# Altium PCB smart-water-sensor.PcbDoc (part 3 of 5)
Units mm, origin at the board's own origin, x right, y up, seen from the top; angles counter-clockwise.
Board outline 124.33 x 108.9 mm, 4 copper layers (Top Layer, Layer 1, Layer 2, Bottom Layer), stack 0.603 mm thick; 150 components, 74 nets, 469 pads, 463 vias.
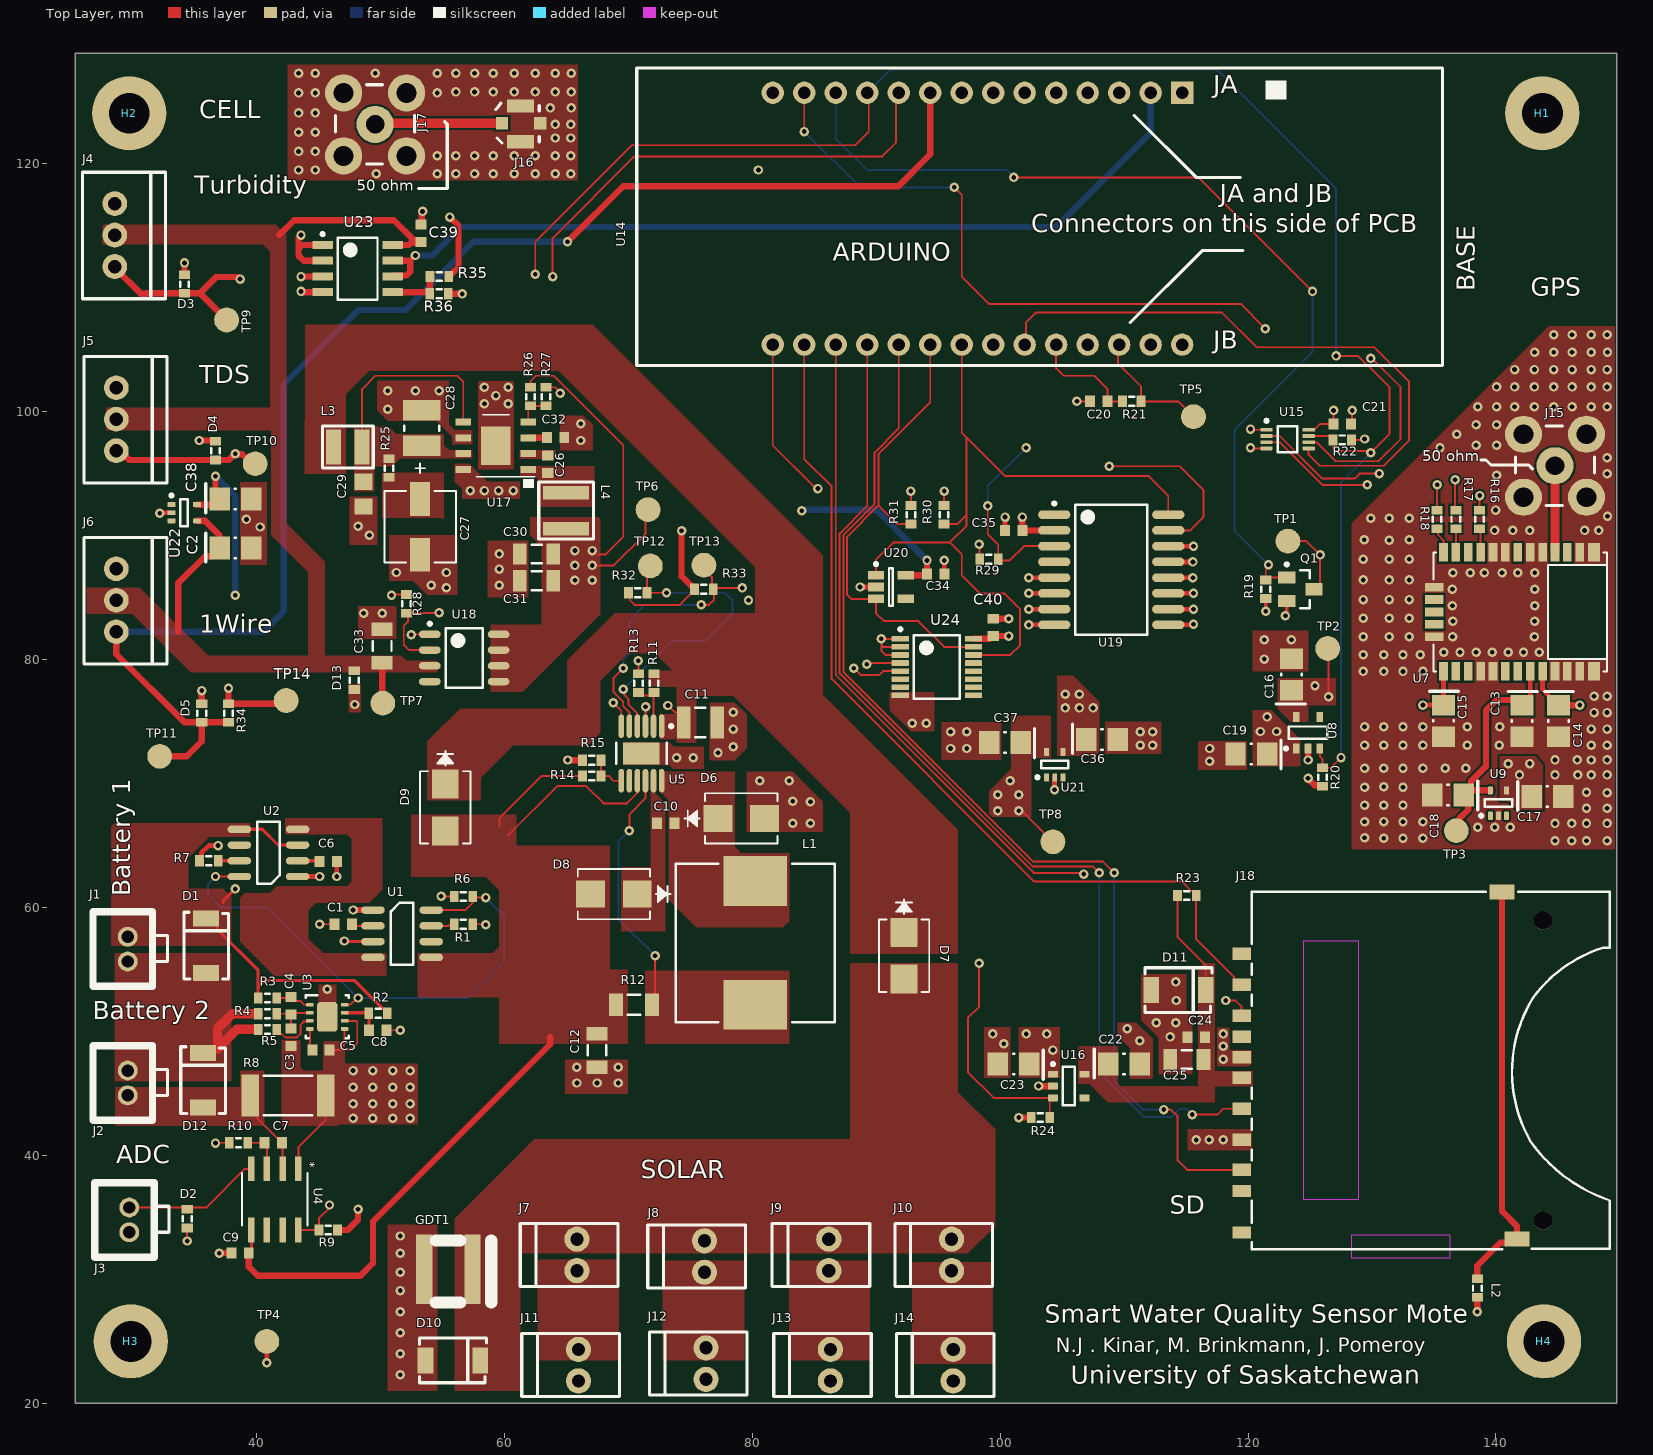
[diagram p0: Top Layer view]

## Part data (continued)
R4: "Resistor", Case/Package=0603, Case Code (Metric)=1608, Manufacturer=Panasonic, Manufacturer Part Number=ERJ3EKF2700V, Max Operating Temperature=155°C, Max Power Dissipation=100mW, Min Operating Temperature=-55°C, Package Quantity=1, Resistance=270R, Supplier Part Number 1=P270HCT-ND, Temperature Coefficient=100ppm/°C, Tolerance=1%, Voltage Rating=75V, Case Code (Imperial)=0603, ComponentLink1Description=https://datasheet.ciiva.com/5860/aoa0000ce2-5860661.pdf?src-supplier=Farnell, ComponentLink1URL=https://datasheet.ciiva.com/5860/aoa0000ce2-5860661.pdf?src-supplier=Farnell, ComponentLink2Description=https://datasheet.ciiva.com/9183/aoa0000ce2-9183606.pdf?src-supplier=Avnet, ComponentLink2URL=https://datasheet.ciiva.com/9183/aoa0000ce2-9183606.pdf?src-supplier=Avnet, ComponentLink3Description=https://datasheet.ciiva.com/16776/70260748-16776089.pdf?src-supplier=Allied+Electronics, ComponentLink3URL=https://datasheet.ciiva.com/16776/70260748-16776089.pdf?src-supplier=Allied+Electronics, ComponentLink4Description=https://datasheet.ciiva.com/17206/aoa0000ce2-17206490.pdf?src-supplier=Avnet+Europe, ComponentLink4URL=https://datasheet.ciiva.com/17206/aoa0000ce2-17206490.pdf?src-supplier=Avnet+Europe, ComponentLink5Description=https://datasheet.ciiva.com/7944/aoa0000ce2-7944619.pdf?src-supplier=Element14, ComponentLink5URL=https://datasheet.ciiva.com/7944/aoa0000ce2-7944619.pdf?src-supplier=Element14, ComponentLink6Description=https://datasheet.ciiva.com/16440/aoa0000ce2-16440189.pdf?src-supplier=Future+Electronics, ComponentLink6URL=https://datasheet.ciiva.com/16440/aoa0000ce2-16440189.pdf?src-supplier=Future+Electronics, ComponentLink7Description=https://datasheet.ciiva.com/46373/1678782-46373901.pdf?src-supplier=Element14, ComponentLink7URL=https://datasheet.ciiva.com/46373/1678782-46373901.pdf?src-supplier=Element14, ComponentLink8Description=https://datasheet.ciiva.com/16511/aoa0000ce2-16511694.pdf?src-supplier=Avnet+Asia, ComponentLink8URL=https://datasheet.ciiva.com/16511/aoa0000ce2-16511694.pdf?src-supplier=Avnet+Asia, ComponentLink9Description=https://datasheet.ciiva.com/16759/70260748-16759566.pdf?src-supplier=Allied+Electronics, ComponentLink9URL=https://datasheet.ciiva.com/16759/70260748-16759566.pdf?src-supplier=Allied+Electronics, ComponentLink10Description=https://datasheet.ciiva.com/22705/1678782-22705422.pdf?src-supplier=Element14, ComponentLink10URL=https://datasheet.ciiva.com/22705/1678782-22705422.pdf?src-supplier=Element14, ComponentLink11Description=https://datasheet.ciiva.com/46373/1678782-46373902.pdf?src-supplier=Element14, ComponentLink11URL=https://datasheet.ciiva.com/46373/1678782-46373902.pdf?src-supplier=Element14, ComponentLink12Description=https://datasheet.ciiva.com/30181/aoa0000ce2-30181327.pdf?src-supplier=Onlinecomponents.com, ComponentLink12URL=https://datasheet.ciiva.com/30181/aoa0000ce2-30181327.pdf?src-supplier=Onlinecomponents.com, Composition="Thick Film", Contact Plating=Tin, Depth=0.8mm, Features="Automotive AEC-Q200", Height=0.022inch, LatestRevisionDate=29-May-2009, LatestRevisionNote="IPC-7351 Footprint Added.", Lead Free="Lead Free", Length=1.6mm, Military Standard=Not, Mount="Surface Mount", Number of Pins=2, Number of Terminations=2, PackageDescription="Chip Resistor", PackageReference=J1-0603, Packaging="Tape and Reel", Power Rating=100mW, Pricing 1="1 = 0.10000, 10 = 0.06500, 100 = 0.02640, 1000 = 0.01186, 2500 = 0.01029 (USD)", Published=8-Jun-2000, Publisher="Altium Limited", Radiation Hardening=No, REACH SVHC="No SVHC", RoHS=Yes, Stock 1=596359, Supplier 1=Digi-Key, Termination=SMD/SMT, Voltage Rating (DC)=75V, Width=0.8mm
R6 R10: "Resistor", Case/Package=0603, Case Code (Metric)=1608, Manufacturer="Stackpole Electronics", Manufacturer Part Number=RMCF0603FT100K, Max Operating Temperature=155°C, Max Power Dissipation=100mW, Min Operating Temperature=-55°C, Resistance=100kR, Supplier Part Number 1=RMCF0603FT100KCT-ND, Temperature Coefficient=100ppm/°C, Tolerance=1%, Working Voltage=75V, Case Code (Imperial)=0603, ComponentLink1Description=https://datasheet.ciiva.com/15193/getdatasheetpartid-362597-15193437.pdf?src-supplier=Verical, ComponentLink1URL=https://datasheet.ciiva.com/15193/getdatasheetpartid-362597-15193437.pdf?src-supplier=Verical, Composition="Thick Film", Contact Plating=Tin, Depth=0.8mm, Features="Automotive AEC-Q200", Height=0.022inch, LatestRevisionDate=29-May-2009, LatestRevisionNote="IPC-7351 Footprint Added.", Lead Free="Lead Free", Length=1.55mm, Military Standard=Not, Mount="Surface Mount", Number of Terminations=2, PackageDescription="Chip Resistor", PackageReference=J1-0603, Packaging="Tape and Reel", Power Rating=100mW, Pricing 1="1 = 0.10000, 10 = 0.01700, 100 = 0.00680, 1000 = 0.00306, 2500 = 0.00266 (USD)", Published=8-Jun-2000, Publisher="Altium Limited", Radiation Hardening=No, RoHS=Yes, Stock 1=1724179, Supplier 1=Digi-Key, Width=0.031inch
R8: "Resistor", Case/Package=2512, Case Code (Metric)=6432, Manufacturer="Stackpole Electronics", Manufacturer Part Number=CSRN2512FKR500, Max Operating Temperature=155°C, Max Power Dissipation=2W, Min Operating Temperature=-55°C, Resistance=500mR, Supplier Part Number 1=CSRN2512FKR500CT-ND, Temperature Coefficient=200ppm/°C, Tolerance=1%, Case Code (Imperial)=2512, ComponentLink1Description=https://www.seielect.com/catalog/SEI-Packaging.pdf?src-supplier=Digi-Key, ComponentLink1URL=https://www.seielect.com/catalog/SEI-Packaging.pdf?src-supplier=Digi-Key, ComponentLink2Description=https://www.seielect.com/Catalog/SEI-CSR_CSRN.pdf?src-supplier=Avnet, ComponentLink2URL=https://www.seielect.com/Catalog/SEI-CSR_CSRN.pdf?src-supplier=Avnet, ComponentLink3Description=http://www.seielect.com/Catalog/SEI-CSR.pdf?src-supplier=Future+Electronics, ComponentLink3URL=http://www.seielect.com/Catalog/SEI-CSR.pdf?src-supplier=Future+Electronics, ComponentLink4Description=http://components.arrow.com/part/dataview/53687976S385769N1174?src-supplier=Arrow, ComponentLink4URL=http://components.arrow.com/part/dataview/53687976S385769N1174?src-supplier=Arrow, ComponentLink5Description=https://www.seielect.com/Catalog/SEI-CSR_CSRN.pdf?src-supplier=Avnet+Asia, ComponentLink5URL=https://www.seielect.com/Catalog/SEI-CSR_CSRN.pdf?src-supplier=Avnet+Asia, ComponentLink6Description=https://www.verical.com/server-webapp/html/getDatasheet?partID=750441&src-supplier=Verical, ComponentLink6URL=https://www.verical.com/server-webapp/html/getDatasheet?partID=750441&src-supplier=Verical, Composition="Thick Film", Contact Plating=Tin, Depth=3.15mm, Height=0.028inch, LatestRevisionDate=29-May-2009, LatestRevisionNote="IPC-7351 Footprint Added.", Lead Free="Lead Free", Length=6.35mm, Military Standard=Not, Mount="Surface Mount", Number of Terminations=2, PackageDescription="Chip Resistor", PackageReference=J1-0603, Packaging="Tape and Reel", Power Rating=2W, Pricing 1="1 = 0.57000, 10 = 0.43800, 25 = 0.33360, 50 = 0.24780, 100 = 0.18420, 250 = 0.15564, 500 = 0.13340 (USD)", Published=8-Jun-2000, Publisher="Altium Limited", Radiation Hardening=No, RoHS=Yes, Stock 1=175686, Supplier 1=Digi-Key, Width=0.124inch
R9 R34: "Resistor", Case/Package=0603, Case Code (Metric)=1608, Manufacturer=Yageo, Manufacturer Part Number=RC0603FR-074K7L, Max Operating Temperature=155°C, Min Operating Temperature=-55°C, Power Rating=100mW, Resistance=4.7kR, Supplier Part Number 1=311-4.70KHRCT-ND, Temperature Coefficient=100ppm/°C, Tolerance=1%, Voltage Rating=50V, Case Code (Imperial)=0603, ComponentLink1Description=https://datasheet.ciiva.com/15189/getdatasheetpartid-422754-15189760.pdf?src-supplier=Verical, ComponentLink1URL=https://datasheet.ciiva.com/15189/getdatasheetpartid-422754-15189760.pdf?src-supplier=Verical, ComponentLink2Description=https://datasheet.ciiva.com/22747/443971-22747528.pdf?src-supplier=Element14, ComponentLink2URL=https://datasheet.ciiva.com/22747/443971-22747528.pdf?src-supplier=Element14, ComponentLink3Description=https://datasheet.ciiva.com/7660/38590-7660794.pdf?src-supplier=Element14, ComponentLink3URL=https://datasheet.ciiva.com/7660/38590-7660794.pdf?src-supplier=Element14, ComponentLink4Description=https://datasheet.ciiva.com/7746/1868787-7746365.pdf?src-supplier=Element14, ComponentLink4URL=https://datasheet.ciiva.com/7746/1868787-7746365.pdf?src-supplier=Element14, ComponentLink5Description=https://datasheet.ciiva.com/46440/1868787-46440909.pdf?src-supplier=Element14, ComponentLink5URL=https://datasheet.ciiva.com/46440/1868787-46440909.pdf?src-supplier=Element14, ComponentLink6Description=https://datasheet.ciiva.com/7746/1738695-7746366.pdf?src-supplier=Element14, ComponentLink6URL=https://datasheet.ciiva.com/7746/1738695-7746366.pdf?src-supplier=Element14, Composition="Thick Film", Depth=0.8mm, Height=0.45mm, LatestRevisionDate=29-May-2009, LatestRevisionNote="IPC-7351 Footprint Added.", Lead Free="Lead Free", Lead Pitch=0.3mm, Length=1.6mm, Military Standard=Not, Number of Pins=2, PackageDescription="Chip Resistor", PackageReference=J1-0603, Packaging="Tape and Reel", Pricing 1="1 = 0.10000, 10 = 0.02400, 100 = 0.00970, 1000 = 0.00437, 2500 = 0.00379 (USD)", Published=8-Jun-2000, Publisher="Altium Limited", REACH SVHC="No SVHC", RoHS=Yes, Stock 1=18304102, Supplier 1=Digi-Key, Termination=SMD/SMT, Voltage Rating (DC)=50V, Width=0.8mm
R11: "Resistor", Case/Package=0603, Case Code (Metric)=1608, Manufacturer=Panasonic, Manufacturer Part Number=ERJ-3EKF3303V, Max Operating Temperature=155°C, Max Power Dissipation=100mW, Min Operating Temperature=-55°C, Package Quantity=1, Resistance=330kR, Supplier Part Number 1=P330KHCT-ND, Temperature Coefficient=100ppm/°C, Tolerance=1%, Voltage Rating=75V, Case Code (Imperial)=0603, ComponentLink1Description=https://datasheet.ciiva.com/17206/aoa0000ce2-17206262.pdf?src-supplier=Avnet+Europe, ComponentLink1URL=https://datasheet.ciiva.com/17206/aoa0000ce2-17206262.pdf?src-supplier=Avnet+Europe, ComponentLink2Description=https://datasheet.ciiva.com/22673/1678782-22673287.pdf?src-supplier=Element14, ComponentLink2URL=https://datasheet.ciiva.com/22673/1678782-22673287.pdf?src-supplier=Element14, ComponentLink3Description=https://datasheet.ciiva.com/16766/70260748-16766613.pdf?src-supplier=Allied+Electronics, ComponentLink3URL=https://datasheet.ciiva.com/16766/70260748-16766613.pdf?src-supplier=Allied+Electronics, ComponentLink4Description=https://datasheet.ciiva.com/7836/aoa0000ce2-7836502.pdf?src-supplier=Element14, ComponentLink4URL=https://datasheet.ciiva.com/7836/aoa0000ce2-7836502.pdf?src-supplier=Element14, ComponentLink5Description=https://datasheet.ciiva.com/24164/aoa0000ce2-24164038.pdf?src-supplier=Mouser, ComponentLink5URL=https://datasheet.ciiva.com/24164/aoa0000ce2-24164038.pdf?src-supplier=Mouser, ComponentLink6Description=https://datasheet.ciiva.com/9117/aoa0000ce2-9117145.pdf?src-supplier=Avnet, ComponentLink6URL=https://datasheet.ciiva.com/9117/aoa0000ce2-9117145.pdf?src-supplier=Avnet, ComponentLink7Description=https://datasheet.ciiva.com/16781/70260748-16781705.pdf?src-supplier=Allied+Electronics, ComponentLink7URL=https://datasheet.ciiva.com/16781/70260748-16781705.pdf?src-supplier=Allied+Electronics, ComponentLink8Description=https://datasheet.ciiva.com/9182/aoa0000ce2-9182954.pdf?src-supplier=Avnet, ComponentLink8URL=https://datasheet.ciiva.com/9182/aoa0000ce2-9182954.pdf?src-supplier=Avnet, ComponentLink9Description=https://datasheet.ciiva.com/30247/aoa0000ce2-30247322.pdf?src-supplier=Onlinecomponents.com, ComponentLink9URL=https://datasheet.ciiva.com/30247/aoa0000ce2-30247322.pdf?src-supplier=Onlinecomponents.com, ComponentLink10Description=https://datasheet.ciiva.com/22687/1678782-22687435.pdf?src-supplier=Element14, ComponentLink10URL=https://datasheet.ciiva.com/22687/1678782-22687435.pdf?src-supplier=Element14, Composition="Thick Film", Contact Plating=Tin, Depth=0.8mm, Features="Automotive AEC-Q200", Height=0.022inch, LatestRevisionDate=29-May-2009, LatestRevisionNote="IPC-7351 Footprint Added.", Lead Free="Lead Free", Length=1.6mm, Military Standard=Not, Mount="Surface Mount", Number of Pins=2, Number of Terminations=2, PackageDescription="Chip Resistor", PackageReference=J1-0603, Packaging="Tape and Reel", Power Rating=100mW, Pricing 1="1=0.10000, 10=0.06500, 100=0.02640, 1000=0.01186, 2500=0.01029 (USD)", Published=8-Jun-2000, Publisher="Altium Limited", Radiation Hardening=No, REACH SVHC="No SVHC", RoHS=Yes, Stock 1=836713, Supplier 1=Digi-Key, Termination=SMD/SMT, Voltage Rating (DC)=75V, Weight=7.1E-05oz, Width=0.8mm
R12: "Resistor", Case/Package=1206, Case Code (Metric)=3216, Manufacturer=Panasonic, Manufacturer Part Number=ERJ-8RQFR22V, Max Operating Temperature=125°C, Max Power Dissipation=250mW, Min Operating Temperature=-55°C, Package Quantity=1, Resistance=220mR, Supplier Part Number 1=P.22RCT-ND, Temperature Coefficient=250ppm/°C, Tolerance=1%, Case Code (Imperial)=1206, ComponentLink1Description=https://datasheet.ciiva.com/11818/0900766b80eefa12-11818582.pdf?src-supplier=RSComponents, ComponentLink1URL=https://datasheet.ciiva.com/11818/0900766b80eefa12-11818582.pdf?src-supplier=RSComponents, ComponentLink2Description=https://datasheet.ciiva.com/28548/1790602-28548389.pdf?src-supplier=Element14, ComponentLink2URL=https://datasheet.ciiva.com/28548/1790602-28548389.pdf?src-supplier=Element14, ComponentLink3Description=https://datasheet.ciiva.com/16773/70068852-16773943.pdf?src-supplier=Allied+Electronics, ComponentLink3URL=https://datasheet.ciiva.com/16773/70068852-16773943.pdf?src-supplier=Allied+Electronics, ComponentLink4Description=https://datasheet.ciiva.com/28694/1790602-28694263.pdf?src-supplier=Element14, ComponentLink4URL=https://datasheet.ciiva.com/28694/1790602-28694263.pdf?src-supplier=Element14, ComponentLink5Description=https://datasheet.ciiva.com/24073/aoa0000ce3-72189-24073048.pdf?src-supplier=Mouser, ComponentLink5URL=https://datasheet.ciiva.com/24073/aoa0000ce3-72189-24073048.pdf?src-supplier=Mouser, ComponentLink6Description=https://datasheet.ciiva.com/9184/aoa0000ce3-9184313.pdf?src-supplier=Avnet, ComponentLink6URL=https://datasheet.ciiva.com/9184/aoa0000ce3-9184313.pdf?src-supplier=Avnet, ComponentLink7Description=https://datasheet.ciiva.com/16395/aoa0000ce3-16395226.pdf?src-supplier=Future+Electronics, ComponentLink7URL=https://datasheet.ciiva.com/16395/aoa0000ce3-16395226.pdf?src-supplier=Future+Electronics, ComponentLink8Description=https://datasheet.ciiva.com/17206/aoa0000ce3-17206890.pdf?src-supplier=Avnet+Europe, ComponentLink8URL=https://datasheet.ciiva.com/17206/aoa0000ce3-17206890.pdf?src-supplier=Avnet+Europe, ComponentLink9Description=https://datasheet.ciiva.com/6064/391509-6064715.pdf?src-supplier=Farnell, ComponentLink9URL=https://datasheet.ciiva.com/6064/391509-6064715.pdf?src-supplier=Farnell, ComponentLink10Description=https://datasheet.ciiva.com/16778/70068852-16778907.pdf?src-supplier=Allied+Electronics, ComponentLink10URL=https://datasheet.ciiva.com/16778/70068852-16778907.pdf?src-supplier=Allied+Electronics, ComponentLink11Description=https://datasheet.ciiva.com/30088/6aoa0000ce3-30088699.pdf?src-supplier=Onlinecomponents.com, ComponentLink11URL=https://datasheet.ciiva.com/30088/6aoa0000ce3-30088699.pdf?src-supplier=Onlinecomponents.com, ComponentLink12Description=https://datasheet.ciiva.com/7710/391509-7710844.pdf?src-supplier=Element14, ComponentLink12URL=https://datasheet.ciiva.com/7710/391509-7710844.pdf?src-supplier=Element14, ComponentLink13Description=https://datasheet.ciiva.com/6064/391509-6064717.pdf?src-supplier=Farnell, ComponentLink13URL=https://datasheet.ciiva.com/6064/391509-6064717.pdf?src-supplier=Farnell, ComponentLink14Description=https://datasheet.ciiva.com/31406/1790602-31406415.pdf?src-supplier=Farnell, ComponentLink14URL=https://datasheet.ciiva.com/31406/1790602-31406415.pdf?src-supplier=Farnell, Composition="Thick Film", Contact Plating=Tin, Depth=1.6mm, Features="Automotive AEC-Q200", Height=0.6mm, LatestRevisionDate=29-May-2009, LatestRevisionNote="IPC-7351 Footprint Added.", Lead Free="Lead Free", Length=3.2mm, Military Standard=Not, Mount="Surface Mount", Number of Pins=2, Number of Terminations=2, PackageDescription="Chip Resistor", PackageReference=J1-0603, Packaging="Tape and Reel", Power Rating=250mW, Pricing 1="1 = 0.39000, 10 = 0.28300, 25 = 0.20920, 50 = 0.15420, 100 = 0.11320, 250 = 0.09348, 500 = 0.07708, 1000 = 0.05576 (USD)", Published=8-Jun-2000, Publisher="Altium Limited", Radiation Hardening=No, REACH SVHC=Unknown, RoHS=Yes, Stock 1=127343, Supplier 1=Digi-Key, Termination=SMD/SMT, Width=1.6mm
R13: "Resistor", Case/Package=0603, Case Code (Metric)=1608, Manufacturer=Yageo, Manufacturer Part Number=RC0603FR-07100KL, Max Operating Temperature=155°C, Min Operating Temperature=-55°C, Power Rating=100mW, Resistance=100kR, Supplier Part Number 1=311-100KHRCT-ND, Temperature Coefficient=100ppm/°C, Tolerance=1%, Voltage Rating=50V, Working Voltage=75V, Case Code (Imperial)=0603, ComponentLink1Description=https://datasheet.ciiva.com/11808/0900766b80f96399-11808107.pdf?src-supplier=RSComponents, ComponentLink1URL=https://datasheet.ciiva.com/11808/0900766b80f96399-11808107.pdf?src-supplier=RSComponents, ComponentLink2Description=https://datasheet.ciiva.com/7983/443971-7983593.pdf?src-supplier=Element14, ComponentLink2URL=https://datasheet.ciiva.com/7983/443971-7983593.pdf?src-supplier=Element14, ComponentLink3Description=https://datasheet.ciiva.com/46440/1868787-46440889.pdf?src-supplier=Element14, ComponentLink3URL=https://datasheet.ciiva.com/46440/1868787-46440889.pdf?src-supplier=Element14, ComponentLink4Description=https://datasheet.ciiva.com/7746/1738695-7746234.pdf?src-supplier=Element14, ComponentLink4URL=https://datasheet.ciiva.com/7746/1738695-7746234.pdf?src-supplier=Element14, ComponentLink5Description=https://datasheet.ciiva.com/7746/1738695-7746235.pdf?src-supplier=Element14, ComponentLink5URL=https://datasheet.ciiva.com/7746/1738695-7746235.pdf?src-supplier=Element14, ComponentLink6Description=https://datasheet.ciiva.com/22747/443971-22747516.pdf?src-supplier=Element14, ComponentLink6URL=https://datasheet.ciiva.com/22747/443971-22747516.pdf?src-supplier=Element14, Composition="Thick Film", Depth=0.8mm, Height=0.45mm, LatestRevisionDate=29-May-2009, LatestRevisionNote="IPC-7351 Footprint Added.", Lead Free="Lead Free", Length=1.6mm, Military Standard=Not, Number of Pins=2, Number of Terminations=2, PackageDescription="Chip Resistor", PackageReference=J1-0603, Packaging="Tape and Reel", Pricing 1="1=0.10000, 10=0.02400, 100=0.00970, 1000=0.00437, 2500=0.00379 (USD)", Published=8-Jun-2000, Publisher="Altium Limited", REACH SVHC="No SVHC", RoHS=Yes, Stock 1=48923364, Supplier 1=Digi-Key, Termination=SMD/SMT, Voltage Rating (DC)=50V, Width=0.8mm
R14: "Resistor", Case/Package=0603, Case Code (Metric)=1608, Manufacturer=Yageo, Manufacturer Part Number=RC0603FR-07634KL, Max Operating Temperature=155°C, Max Power Dissipation=100mW, Min Operating Temperature=-55°C, Package Quantity=1, Resistance=634kR, Supplier Part Number 1=311-634KHRCT-ND, Temperature Coefficient=100ppm/°C, Tolerance=1%, Voltage Rating=50V, Case Code (Imperial)=0603, ComponentLink1Description=https://datasheet.ciiva.com/2455/pyu-r-int-thick-7-2455320.pdf?src-supplier=Digi-Key, ComponentLink1URL=https://datasheet.ciiva.com/2455/pyu-r-int-thick-7-2455320.pdf?src-supplier=Digi-Key, ComponentLink2Description=https://datasheet.ciiva.com/2455/pyu-r-int-thick-7-2455321.pdf?src-supplier=Digi-Key, ComponentLink2URL=https://datasheet.ciiva.com/2455/pyu-r-int-thick-7-2455321.pdf?src-supplier=Digi-Key, ComponentLink3Description=https://datasheet.ciiva.com/2455/pyu-r-int-thick-7-2455322.pdf?src-supplier=Digi-Key, ComponentLink3URL=https://datasheet.ciiva.com/2455/pyu-r-int-thick-7-2455322.pdf?src-supplier=Digi-Key, ComponentLink4Description=https://datasheet.ciiva.com/12560/rc0603-272842-12560941.pdf?src-supplier=Mouser, ComponentLink4URL=https://datasheet.ciiva.com/12560/rc0603-272842-12560941.pdf?src-supplier=Mouser, Composition="Thick Film", Depth=0.8mm, Features="Moisture Resistant", Height=0.022inch, LatestRevisionDate=29-May-2009, LatestRevisionNote="IPC-7351 Footprint Added.", Lead Free="Lead Free", Length=1.6mm, Military Standard=Not, Number of Terminations=2, PackageDescription="Chip Resistor", PackageReference=J1-0603, Packaging="Tape and Reel", Power Rating=100mW, Pricing 1="1 = 0.10000, 10 = 0.02400, 100 = 0.00970, 1000 = 0.00437, 2500 = 0.00379 (USD)", Published=8-Jun-2000, Publisher="Altium Limited", RoHS=Yes, Stock 1=347605, Supplier 1=Digi-Key, Termination=SMD/SMT, Voltage Rating (DC)=50V, Width=0.031inch
R15: "Resistor", Case/Package=0603, Case Code (Metric)=1608, Manufacturer=Yageo, Manufacturer Part Number=RC0603FR-07412KL, Max Operating Temperature=155°C, Max Power Dissipation=100mW, Min Operating Temperature=-55°C, Package Quantity=1, Resistance=412kR, Supplier Part Number 1=311-412KHRCT-ND, Temperature Coefficient=100ppm/°C, Tolerance=1%, Voltage Rating (DC)=50V, Case Code (Imperial)=0603, ComponentLink1Description=https://datasheet.ciiva.com/2454/pyu-r-int-thick-7-2454489.pdf?src-supplier=Digi-Key, ComponentLink1URL=https://datasheet.ciiva.com/2454/pyu-r-int-thick-7-2454489.pdf?src-supplier=Digi-Key, ComponentLink2Description=https://datasheet.ciiva.com/2454/pyu-r-int-thick-7-2454490.pdf?src-supplier=Digi-Key, ComponentLink2URL=https://datasheet.ciiva.com/2454/pyu-r-int-thick-7-2454490.pdf?src-supplier=Digi-Key, ComponentLink3Description=https://datasheet.ciiva.com/2454/pyu-r-int-thick-7-2454491.pdf?src-supplier=Digi-Key, ComponentLink3URL=https://datasheet.ciiva.com/2454/pyu-r-int-thick-7-2454491.pdf?src-supplier=Digi-Key, Composition="Thick Film", Depth=0.8mm, Features="Moisture Resistant", Height=0.022inch, LatestRevisionDate=29-May-2009, LatestRevisionNote="IPC-7351 Footprint Added.", Lead Free="Lead Free", Length=0.063inch, Military Standard=Not, Number of Terminations=2, PackageDescription="Chip Resistor", PackageReference=J1-0603, Packaging="Tape and Reel", Pricing 1="1 = 0.10000, 10 = 0.02400, 100 = 0.00970, 1000 = 0.00437, 2500 = 0.00379 (USD)", Published=8-Jun-2000, Publisher="Altium Limited", RoHS=Yes, Stock 1=153403, Supplier 1=Digi-Key, Width=0.031inch
R16 R17 R18: "Resistor", Manufacturer=Yageo, Manufacturer Part Number=RC0603FR-07220RL, Operating Temperature="-55°C ~ 155°C", Package / Case="0603 (1608 Metric)", Power (Watts)="0.1W, 1/10W", Supplier Device Package=0603, Supplier Part Number 1=311-220HRCT-ND, Temperature Coefficient=±100ppm/°C, Tolerance=±1%, Category=Resistors, ComponentLink1Description=http://www.yageo.com/documents/recent/PYu-RC_Group_51_RoHS_L_7.pdf, ComponentLink1URL=http://www.yageo.com/documents/recent/PYu-RC_Group_51_RoHS_L_7.pdf, Composition="Thick Film", Failure Rate=-, Features="Moisture Resistant", Height - Seated (Max)="0.022\" (0.55mm)", LatestRevisionDate=29-May-2009, LatestRevisionNote="IPC-7351 Footprint Added.", PackageDescription="Chip Resistor", PackageReference=J1-0603, Packaging="Cut Tape (CT)", Part Status=Active, Pricing 1="1=0.14, 10=0.021, 100=0.0086, 1000=0.00383, 2500=0.00333 (CAD)", Published=8-Jun-2000, Publisher="Altium Limited", RoHS="RoHS Compliant", Size / Dimension="0.063\" L x 0.032\" W (1.60mm x 0.80mm)", Stock 1=1006774, Supplier 1=Digi-Key
R19 R29: "Resistor", Manufacturer=Yageo, Manufacturer Part Number=RC0603FR-07100KL, Operating Temperature="-55°C ~ 155°C", Package / Case="0603 (1608 Metric)", Power (Watts)="0.1W, 1/10W", Supplier Device Package=0603, Supplier Part Number 1=311-100KHRCT-ND, Temperature Coefficient=±100ppm/°C, Tolerance=±1%, Category=Resistors, ComponentLink1Description=http://www.yageo.com/documents/recent/PYu-RC_Group_51_RoHS_L_7.pdf, ComponentLink1URL=http://www.yageo.com/documents/recent/PYu-RC_Group_51_RoHS_L_7.pdf, Composition="Thick Film", Failure Rate=-, Features="Moisture Resistant", Height - Seated (Max)="0.022\" (0.55mm)", LatestRevisionDate=29-May-2009, LatestRevisionNote="IPC-7351 Footprint Added.", PackageDescription="Chip Resistor", PackageReference=J1-0603, Packaging="Cut Tape (CT)", Part Status=Active, Pricing 1="1=0.14, 10=0.021, 100=0.0086, 1000=0.00383, 2500=0.00333 (CAD)", Published=8-Jun-2000, Publisher="Altium Limited", RoHS="RoHS Compliant", Size / Dimension="0.063\" L x 0.032\" W (1.60mm x 0.80mm)", Stock 1=8279421, Supplier 1=Digi-Key
R20 R21 R22 R23 R24 R28 R30 R31 R32 R33: "Resistor", Case/Package=0603, Case Code (Metric)=1608, Manufacturer=Yageo, Manufacturer Part Number=RC0603FR-0710KL, Max Operating Temperature=155°C, Min Operating Temperature=-55°C, Power Rating=100mW, Resistance=10kR, Supplier Part Number 1=311-10.0KHRCT-ND, Temperature Coefficient=100ppm/°C, Tolerance=1%, Voltage Rating=75V, Voltage Rating (DC)=50V, Case Code (Imperial)=0603, ComponentLink1Description=https://datasheet.ciiva.com/7660/38590-7660789.pdf?src-supplier=Element14, ComponentLink1URL=https://datasheet.ciiva.com/7660/38590-7660789.pdf?src-supplier=Element14, ComponentLink2Description=https://datasheet.ciiva.com/15189/getdatasheetpartid-409289-15189591.pdf?src-supplier=Verical, ComponentLink2URL=https://datasheet.ciiva.com/15189/getdatasheetpartid-409289-15189591.pdf?src-supplier=Verical, ComponentLink3Description=https://datasheet.ciiva.com/46440/1868787-46440891.pdf?src-supplier=Element14, ComponentLink3URL=https://datasheet.ciiva.com/46440/1868787-46440891.pdf?src-supplier=Element14, ComponentLink4Description=https://datasheet.ciiva.com/7983/443971-7983596.pdf?src-supplier=Element14, ComponentLink4URL=https://datasheet.ciiva.com/7983/443971-7983596.pdf?src-supplier=Element14, ComponentLink5Description=https://datasheet.ciiva.com/7746/1738695-7746239.pdf?src-supplier=Element14, ComponentLink5URL=https://datasheet.ciiva.com/7746/1738695-7746239.pdf?src-supplier=Element14, ComponentLink6Description=https://datasheet.ciiva.com/22747/443971-22747519.pdf?src-supplier=Element14, ComponentLink6URL=https://datasheet.ciiva.com/22747/443971-22747519.pdf?src-supplier=Element14, Composition="Thick Film", Depth=0.8mm, Height=0.45mm, LatestRevisionDate=29-May-2009, LatestRevisionNote="IPC-7351 Footprint Added.", Lead Free="Lead Free", Lead Pitch=0.3mm, Length=1.6mm, Military Standard=Not, Number of Pins=2, PackageDescription="Chip Resistor", PackageReference=J1-0603, Packaging="Tape and Reel", Pricing 1="1 = 0.10000, 10 = 0.02400, 100 = 0.00970, 1000 = 0.00437, 2500 = 0.00379 (USD)", Published=8-Jun-2000, Publisher="Altium Limited", REACH SVHC="No SVHC", RoHS=Yes, Stock 1=90146690, Supplier 1=Digi-Key, Termination=SMD/SMT, Weight=7.1E-05oz, Width=0.8mm
R25: "Resistor", Case/Package=0603, Case Code (Metric)=1608, Manufacturer=Panasonic, Manufacturer Part Number=ERJ3RSFR10V, Max Operating Temperature=125°C, Max Power Dissipation=100mW, Min Operating Temperature=-55°C, Package Quantity=5000, Resistance=100mR, Supplier Part Number 1=P.10AJCT-ND, Temperature Coefficient=300ppm/°C, Tolerance=1%, Case Code (Imperial)=0603, ComponentLink1Description=https://datasheet.ciiva.com/11818/0900766b80eefa12-11818379.pdf?src-supplier=RSComponents, ComponentLink1URL=https://datasheet.ciiva.com/11818/0900766b80eefa12-11818379.pdf?src-supplier=RSComponents, ComponentLink2Description=https://datasheet.ciiva.com/9186/aoa0000ce3-9186678.pdf?src-supplier=Avnet, ComponentLink2URL=https://datasheet.ciiva.com/9186/aoa0000ce3-9186678.pdf?src-supplier=Avnet, ComponentLink3Description=https://datasheet.ciiva.com/28577/391509-28577782.pdf?src-supplier=Element14, ComponentLink3URL=https://datasheet.ciiva.com/28577/391509-28577782.pdf?src-supplier=Element14, ComponentLink4Description=https://datasheet.ciiva.com/30245/6aoa0000ce3-30245798.pdf?src-supplier=Onlinecomponents.com, ComponentLink4URL=https://datasheet.ciiva.com/30245/6aoa0000ce3-30245798.pdf?src-supplier=Onlinecomponents.com, ComponentLink5Description=https://datasheet.ciiva.com/6137/391509-6137623.pdf?src-supplier=Farnell, ComponentLink5URL=https://datasheet.ciiva.com/6137/391509-6137623.pdf?src-supplier=Farnell, ComponentLink6Description=https://datasheet.ciiva.com/16396/aoa0000ce3-16396839.pdf?src-supplier=Future+Electronics, ComponentLink6URL=https://datasheet.ciiva.com/16396/aoa0000ce3-16396839.pdf?src-supplier=Future+Electronics, ComponentLink7Description=https://datasheet.ciiva.com/17208/aoa0000ce3-17208042.pdf?src-supplier=Avnet+Europe, ComponentLink7URL=https://datasheet.ciiva.com/17208/aoa0000ce3-17208042.pdf?src-supplier=Avnet+Europe, ComponentLink8Description=https://datasheet.ciiva.com/24027/aoa0000ce3-72189-24027996.pdf?src-supplier=Mouser, ComponentLink8URL=https://datasheet.ciiva.com/24027/aoa0000ce3-72189-24027996.pdf?src-supplier=Mouser, ComponentLink9Description=https://datasheet.ciiva.com/46449/391509-46449485.pdf?src-supplier=Element14, ComponentLink9URL=https://datasheet.ciiva.com/46449/391509-46449485.pdf?src-supplier=Element14, ComponentLink10Description=https://datasheet.ciiva.com/16771/70068852-16771902.pdf?src-supplier=Allied+Electronics, ComponentLink10URL=https://datasheet.ciiva.com/16771/70068852-16771902.pdf?src-supplier=Allied+Electronics, ComponentLink11Description=https://datasheet.ciiva.com/46449/391509-46449486.pdf?src-supplier=Element14, ComponentLink11URL=https://datasheet.ciiva.com/46449/391509-46449486.pdf?src-supplier=Element14, ComponentLink12Description=https://datasheet.ciiva.com/28667/391509-28667695.pdf?src-supplier=Element14, ComponentLink12URL=https://datasheet.ciiva.com/28667/391509-28667695.pdf?src-supplier=Element14, Composition="Thick Film", Contact Plating=Tin, Depth=0.8mm, Height=0.45mm, LatestRevisionDate=29-May-2009, LatestRevisionNote="IPC-7351 Footprint Added.", Lead Free="Lead Free", Length=1.6mm, Military Standard=Not, Mount="Surface Mount", Number of Pins=2, Number of Terminations=2, PackageDescription="Chip Resistor", PackageReference=J1-0603, Packaging="Tape and Reel", Power Rating=100mW, Pricing 1="1 = 0.31000, 10 = 0.26200, 25 = 0.19040, 50 = 0.13800, 100 = 0.10230, 250 = 0.07852, 500 = 0.06186, 1000 = 0.04283 (USD)", Published=8-Jun-2000, Publisher="Altium Limited", Radiation Hardening=No, REACH SVHC="No SVHC", RoHS=Yes, Stock 1=499056, Supplier 1=Digi-Key, Termination=SMD/SMT, Width=0.031inch
R26: "Resistor", Case/Package=0603, Case Code (Metric)=1608, Manufacturer=Panasonic, Manufacturer Part Number=ERA3AEB8872V, Max Operating Temperature=155°C, Max Power Dissipation=100mW, Min Operating Temperature=-55°C, Package Quantity=1, Resistance=88.7kR, Supplier Part Number 1=P88.7KDBCT-ND, Temperature Coefficient=25ppm/°C, Tolerance=0.1%, Voltage Rating=75V, Case Code (Imperial)=0603, ComponentLink1Description=https://datasheet.ciiva.com/11810/0900766b80eb1d8c-11810560.pdf?src-supplier=RSComponents, ComponentLink1URL=https://datasheet.ciiva.com/11810/0900766b80eb1d8c-11810560.pdf?src-supplier=RSComponents, ComponentLink2Description=https://datasheet.ciiva.com/7920/485442-7920389.pdf?src-supplier=Element14, ComponentLink2URL=https://datasheet.ciiva.com/7920/485442-7920389.pdf?src-supplier=Element14, ComponentLink3Description=https://datasheet.ciiva.com/6053/485442-6053174.pdf?src-supplier=Farnell, ComponentLink3URL=https://datasheet.ciiva.com/6053/485442-6053174.pdf?src-supplier=Farnell, ComponentLink4Description=https://datasheet.ciiva.com/6053/485442-6053175.pdf?src-supplier=Farnell, ComponentLink4URL=https://datasheet.ciiva.com/6053/485442-6053175.pdf?src-supplier=Farnell, ComponentLink5Description=https://datasheet.ciiva.com/6053/485442-6053177.pdf?src-supplier=Farnell, ComponentLink5URL=https://datasheet.ciiva.com/6053/485442-6053177.pdf?src-supplier=Farnell, ComponentLink6Description=https://datasheet.ciiva.com/17208/aoa0000ce26-17208382.pdf?src-supplier=Avnet+Europe, ComponentLink6URL=https://datasheet.ciiva.com/17208/aoa0000ce26-17208382.pdf?src-supplier=Avnet+Europe, Composition="Metal Film", Contact Plating=Tin, Depth=0.8mm, Features="Automotive AEC-Q200", Height=0.45mm, LatestRevisionDate=29-May-2009, LatestRevisionNote="IPC-7351 Footprint Added.", Lead Free="Lead Free", Length=1.6mm, Military Standard=Not, Mount="Surface Mount", Number of Pins=2, Number of Terminations=2, PackageDescription="Chip Resistor", PackageReference=J1-0603, Packaging="Tape and Reel", Power Rating=100mW, Pricing 1="1 = 0.35000, 10 = 0.30000, 100 = 0.11720, 1000 = 0.04906, 2500 = 0.04498 (USD)", Published=8-Jun-2000, Publisher="Altium Limited", Radiation Hardening=No, RoHS=Yes, Stock 1=25375, Supplier 1=Digi-Key, Voltage Rating (DC)=75V, Width=0.8mm
R27: "Resistor", Case/Package=0603, Case Code (Metric)=1608, Manufacturer=Panasonic, Manufacturer Part Number=ERA-3AEB2212V, Max Operating Temperature=155°C, Max Power Dissipation=100mW, Min Operating Temperature=-55°C, Package Quantity=1, Resistance=22.1kR, Supplier Part Number 1=P22.1KDBCT-ND, Temperature Coefficient=25ppm/°C, Tolerance=0.1%, Voltage Rating=150V, Voltage Rating (DC)=75V, Case Code (Imperial)=0603, ComponentLink1Description=https://datasheet.ciiva.com/11810/0900766b80eb1d8c-11810643.pdf?src-supplier=RSComponents, ComponentLink1URL=https://datasheet.ciiva.com/11810/0900766b80eb1d8c-11810643.pdf?src-supplier=RSComponents, ComponentLink2Description=https://datasheet.ciiva.com/29183/452175-da-01-en-widerstand-0603-era-29183955.pdf?src-supplier=Conrad, ComponentLink2URL=https://datasheet.ciiva.com/29183/452175-da-01-en-widerstand-0603-era-29183955.pdf?src-supplier=Conrad, ComponentLink3Description=https://datasheet.ciiva.com/17210/aoa0000ce26-17210837.pdf?src-supplier=Avnet+Europe, ComponentLink3URL=https://datasheet.ciiva.com/17210/aoa0000ce26-17210837.pdf?src-supplier=Avnet+Europe, ComponentLink4Description=https://datasheet.ciiva.com/5998/485442-5998316.pdf?src-supplier=Farnell, ComponentLink4URL=https://datasheet.ciiva.com/5998/485442-5998316.pdf?src-supplier=Farnell, ComponentLink5Description=https://datasheet.ciiva.com/9191/aoa0000ce26-9191805.pdf?src-supplier=Avnet, ComponentLink5URL=https://datasheet.ciiva.com/9191/aoa0000ce26-9191805.pdf?src-supplier=Avnet, ComponentLink6Description=https://datasheet.ciiva.com/5998/485442-5998319.pdf?src-supplier=Farnell, ComponentLink6URL=https://datasheet.ciiva.com/5998/485442-5998319.pdf?src-supplier=Farnell, ComponentLink7Description=https://datasheet.ciiva.com/46422/485442-46422607.pdf?src-supplier=Element14, ComponentLink7URL=https://datasheet.ciiva.com/46422/485442-46422607.pdf?src-supplier=Element14, Composition="Thin Film", Contact Plating=Tin, Depth=0.8mm, Features="Automotive AEC-Q200", Height=0.45mm, LatestRevisionDate=29-May-2009, LatestRevisionNote="IPC-7351 Footprint Added.", Lead Free="Lead Free", Length=1.6mm, Military Standard=Not, Mount="Surface Mount", Number of Pins=2, Number of Terminations=2, PackageDescription="Chip Resistor", PackageReference=J1-0603, Packaging="Tape and Reel", Power Rating=100mW, Pricing 1="1 = 0.35000, 10 = 0.30000, 100 = 0.11720, 1000 = 0.04906, 2500 = 0.04498 (USD)", Published=8-Jun-2000, Publisher="Altium Limited", Radiation Hardening=No, REACH SVHC="No SVHC", RoHS=Yes, Stock 1=138256, Supplier 1=Digi-Key, Termination=SMD/SMT, Width=0.8mm
R35: "Resistor", Case/Package=0603, Case Code (Metric)=1608, Manufacturer=Panasonic, Manufacturer Part Number=ERA3AEB182V, Max Operating Temperature=155°C, Max Power Dissipation=100mW, Min Operating Temperature=-55°C, Package Quantity=1, Resistance=1.8kR, Supplier Part Number 1=P1.8KDBCT-ND, Temperature Coefficient=25ppm/°C, Tolerance=0.1%, Voltage Rating=75V, Case Code (Imperial)=0603, ComponentLink1Description=https://datasheet.ciiva.com/11808/0900766b80fe20f7-11808057.pdf?src-supplier=RSComponents, ComponentLink1URL=https://datasheet.ciiva.com/11808/0900766b80fe20f7-11808057.pdf?src-supplier=RSComponents, ComponentLink2Description=https://datasheet.ciiva.com/29183/450862-da-01-en-widerstand-0603-era-29183768.pdf?src-supplier=Conrad, ComponentLink2URL=https://datasheet.ciiva.com/29183/450862-da-01-en-widerstand-0603-era-29183768.pdf?src-supplier=Conrad, ComponentLink3Description=https://datasheet.ciiva.com/6000/485442-6000901.pdf?src-supplier=Farnell, ComponentLink3URL=https://datasheet.ciiva.com/6000/485442-6000901.pdf?src-supplier=Farnell, ComponentLink4Description=https://datasheet.ciiva.com/48425/era-eng-tds-48425432.pdf?src-supplier=Distrelec, ComponentLink4URL=https://datasheet.ciiva.com/48425/era-eng-tds-48425432.pdf?src-supplier=Distrelec, ComponentLink5Description=https://datasheet.ciiva.com/17214/aoa0000ce26-17214494.pdf?src-supplier=Avnet+Europe, ComponentLink5URL=https://datasheet.ciiva.com/17214/aoa0000ce26-17214494.pdf?src-supplier=Avnet+Europe, ComponentLink6Description=https://datasheet.ciiva.com/9197/aoa0000ce26-9197737.pdf?src-supplier=Avnet, ComponentLink6URL=https://datasheet.ciiva.com/9197/aoa0000ce26-9197737.pdf?src-supplier=Avnet, ComponentLink7Description=https://datasheet.ciiva.com/46422/485442-46422587.pdf?src-supplier=Element14, ComponentLink7URL=https://datasheet.ciiva.com/46422/485442-46422587.pdf?src-supplier=Element14, ComponentLink8Description=https://datasheet.ciiva.com/30218/54aoa0000ce26-30218060.pdf?src-supplier=Onlinecomponents.com, ComponentLink8URL=https://datasheet.ciiva.com/30218/54aoa0000ce26-30218060.pdf?src-supplier=Onlinecomponents.com, ComponentLink9Description=https://datasheet.ciiva.com/46422/485442-46422588.pdf?src-supplier=Element14, ComponentLink9URL=https://datasheet.ciiva.com/46422/485442-46422588.pdf?src-supplier=Element14, ComponentLink10Description=https://datasheet.ciiva.com/43455/485442-43455222.pdf?src-supplier=Farnell, ComponentLink10URL=https://datasheet.ciiva.com/43455/485442-43455222.pdf?src-supplier=Farnell, ComponentLink11Description=https://datasheet.ciiva.com/46422/485442-46422589.pdf?src-supplier=Element14, ComponentLink11URL=https://datasheet.ciiva.com/46422/485442-46422589.pdf?src-supplier=Element14, Composition="Thin Film", Contact Plating=Tin, Depth=0.8mm, Features="Automotive AEC-Q200", Height=0.022inch, LatestRevisionDate=29-May-2009, LatestRevisionNote="IPC-7351 Footprint Added.", Lead Free="Lead Free", Length=1.6mm, Military Standard=Not, Mount="Surface Mount", Number of Pins=2, Number of Terminations=2, PackageDescription="Chip Resistor", PackageReference=J1-0603, Packaging="Tape and Reel", Power Rating=100mW, Pricing 1="1=0.35000, 10=0.30000, 100=0.11720, 1000=0.04906, 2500=0.04498 (USD)", Published=8-Jun-2000, Publisher="Altium Limited", Radiation Hardening=No, REACH SVHC="No SVHC", RoHS=Yes, Stock 1=69670, Supplier 1=Digi-Key, Termination=SMD/SMT, Voltage Rating (DC)=75V, Width=0.031inch
R36: "Resistor", Case/Package=0603, Case Code (Metric)=1608, Manufacturer=Panasonic, Manufacturer Part Number=ERA-3AEB332V, Max Operating Temperature=155°C, Max Power Dissipation=100mW, Min Operating Temperature=-55°C, Package Quantity=1, Resistance=3.3kR, Supplier Part Number 1=P3.3KDBCT-ND, Temperature Coefficient=25ppm/°C, Tolerance=0.1%, Voltage Rating=75V, Case Code (Imperial)=0603, ComponentLink1Description=https://datasheet.ciiva.com/11808/0900766b80fe20f7-11808044.pdf?src-supplier=RSComponents, ComponentLink1URL=https://datasheet.ciiva.com/11808/0900766b80fe20f7-11808044.pdf?src-supplier=RSComponents, ComponentLink2Description=https://datasheet.ciiva.com/29183/450962-da-01-en-widerstand-0603-era-29183781.pdf?src-supplier=Conrad, ComponentLink2URL=https://datasheet.ciiva.com/29183/450962-da-01-en-widerstand-0603-era-29183781.pdf?src-supplier=Conrad, ComponentLink3Description=https://datasheet.ciiva.com/16783/70068849-16783127.pdf?src-supplier=Allied+Electronics, ComponentLink3URL=https://datasheet.ciiva.com/16783/70068849-16783127.pdf?src-supplier=Allied+Electronics, ComponentLink4Description=https://datasheet.ciiva.com/46397/485442-46397447.pdf?src-supplier=Element14, ComponentLink4URL=https://datasheet.ciiva.com/46397/485442-46397447.pdf?src-supplier=Element14, ComponentLink5Description=https://datasheet.ciiva.com/46397/485442-46397448.pdf?src-supplier=Element14, ComponentLink5URL=https://datasheet.ciiva.com/46397/485442-46397448.pdf?src-supplier=Element14, ComponentLink6Description=https://datasheet.ciiva.com/43455/485442-43455225.pdf?src-supplier=Farnell, ComponentLink6URL=https://datasheet.ciiva.com/43455/485442-43455225.pdf?src-supplier=Farnell, ComponentLink7Description=https://datasheet.ciiva.com/9196/aoa0000ce26-9196554.pdf?src-supplier=Avnet, ComponentLink7URL=https://datasheet.ciiva.com/9196/aoa0000ce26-9196554.pdf?src-supplier=Avnet, ComponentLink8Description=https://datasheet.ciiva.com/16395/aoa0000ce26-16395258.pdf?src-supplier=Future+Electronics, ComponentLink8URL=https://datasheet.ciiva.com/16395/aoa0000ce26-16395258.pdf?src-supplier=Future+Electronics, ComponentLink9Description=https://datasheet.ciiva.com/16785/70068849-16785020.pdf?src-supplier=Allied+Electronics, ComponentLink9URL=https://datasheet.ciiva.com/16785/70068849-16785020.pdf?src-supplier=Allied+Electronics, ComponentLink10Description=https://datasheet.ciiva.com/30210/54aoa0000ce26-30210940.pdf?src-supplier=Onlinecomponents.com, ComponentLink10URL=https://datasheet.ciiva.com/30210/54aoa0000ce26-30210940.pdf?src-supplier=Onlinecomponents.com, ComponentLink11Description=https://datasheet.ciiva.com/6137/485442-6137949.pdf?src-supplier=Farnell, ComponentLink11URL=https://datasheet.ciiva.com/6137/485442-6137949.pdf?src-supplier=Farnell, ComponentLink12Description=https://datasheet.ciiva.com/43457/485442-43457774.pdf?src-supplier=Farnell, ComponentLink12URL=https://datasheet.ciiva.com/43457/485442-43457774.pdf?src-supplier=Farnell, ComponentLink13Description=https://datasheet.ciiva.com/48530/era-eng-tds-48530478.pdf?src-supplier=Distrelec, ComponentLink13URL=https://datasheet.ciiva.com/48530/era-eng-tds-48530478.pdf?src-supplier=Distrelec, Composition="Metal Film", Contact Plating=Tin, Depth=0.8mm, Features="Automotive AEC-Q200", Height=0.45mm, LatestRevisionDate=29-May-2009, LatestRevisionNote="IPC-7351 Footprint Added.", Lead Free="Lead Free", Length=1.6mm, Military Standard=Not, Mount="Surface Mount", Number of Pins=2, Number of Terminations=2, PackageDescription="Chip Resistor", PackageReference=J1-0603, Packaging="Tape and Reel", Power Rating=100mW, Pricing 1="1=0.35000, 10=0.30000, 100=0.11720, 1000=0.04906, 2500=0.04498 (USD)", Published=8-Jun-2000, Publisher="Altium Limited", Radiation Hardening=No, REACH SVHC="No SVHC", RoHS=Yes, Stock 1=140800, Supplier 1=Digi-Key, Termination=SMD/SMT, Voltage Rating (DC)=75V, Width=0.8mm
TP1 TP2 TP3 TP4 TP5 TP6 TP7 TP8 TP9 TP10 TP11 TP12 TP13 TP14: library part "SMT Testpoint", "SMT Testpoint"
U1 U2: "IC PWR MGR EFUSE 18V 8SOIC", Case/Package=SOIC, Manufacturer="Texas Instruments", Max Operating Temperature=85°C, Max Output Current=1.7A, Max Supply Current=580uA, Max Supply Voltage=18V, Min Operating Temperature=-40°C, Min Supply Voltage=4.5V, Operating Supply Current=410uA, Supplier Part Number 1=296-40731-1-ND, ComponentLink1Description=http://www.ti.com/general/docs/lit/getliterature.tsp?genericPartNumber=TPS25921L&&fileType=pdf&src-supplier=Avnet+Asia, ComponentLink1URL=http://www.ti.com/general/docs/lit/getliterature.tsp?genericPartNumber=TPS25921L&&fileType=pdf&src-supplier=Avnet+Asia, ComponentLink2Description=http://www.ti.com/lit/ds/symlink/tps25921a.pdf?src-supplier=Digi-Key, ComponentLink2URL=http://www.ti.com/lit/ds/symlink/tps25921a.pdf?src-supplier=Digi-Key, ComponentLink3Description=http://www.ti.com/general/docs/lit/getliterature.tsp?genericPartNumber=TPS25921L&&fileType=pdf&src-supplier=Avnet, ComponentLink3URL=http://www.ti.com/general/docs/lit/getliterature.tsp?genericPartNumber=TPS25921L&&fileType=pdf&src-supplier=Avnet, Contact Plating=Gold, Features="Auto Retry", Lead Free="Lead Free", Manufacturer Part Number=TPS25921ADR, Mount="Surface Mount", Number of Channels=1, Number of Pins=8, Packaging="Tape and Reel", Pricing 1="1=1.50000, 10=1.33700, 100=1.04240, 500=0.86108, 1000=0.67980 (USD)", Radiation Hardening=No, RoHS=Yes, Stock 1=75213, Supplier 1=Digi-Key
U3: library part CMP-0321-00626-2, "Voltage Protection with Automatic Cell Balance for 2-Cell Li-Ion Batteries, OVP=4.3 V, -40 to 85 degC, 8-pin SON (DRB), Green (RoHS & no Sb/Br)", Manufacturer="Texas Instruments", Max Operating Temperature=110°C, Max Supply Voltage=10V, Min Operating Temperature=-40°C, Min Supply Voltage=4V, Operating Supply Current=6uA, Output Current=85uA, Output Voltage=4.3V, Over Voltage Protection=N, Package Quantity=3000, Supplier Part Number 1=296-27677-1-ND, ComponentLink1Description=Datasheet, ComponentLink1URL=http://www.ti.com/general/docs/lit/getliterature.tsp?genericPartNumber=BQ29209&fileType=pdf, ComponentLink2Description=https://datasheet.ciiva.com/3213/bq29200-3213301.pdf?src-supplier=Avnet, ComponentLink2URL=https://datasheet.ciiva.com/3213/bq29200-3213301.pdf?src-supplier=Avnet, ComponentLink3Description=https://datasheet.ciiva.com/15115/getdatasheetpartid-517795-15115193.pdf?src-supplier=Verical, ComponentLink3URL=https://datasheet.ciiva.com/15115/getdatasheetpartid-517795-15115193.pdf?src-supplier=Verical, ComponentLink4Description=https://datasheet.ciiva.com/3214/bq29200-3214534.pdf?src-supplier=Avnet, ComponentLink4URL=https://datasheet.ciiva.com/3214/bq29200-3214534.pdf?src-supplier=Avnet, ComponentLink5Description=https://datasheet.ciiva.com/1932/bq29200-09-1932170.pdf?src-supplier=Digi-Key, ComponentLink5URL=https://datasheet.ciiva.com/1932/bq29200-09-1932170.pdf?src-supplier=Digi-Key, ComponentLink6Description=https://datasheet.ciiva.com/1932/bq29200-09-1932171.pdf?src-supplier=Digi-Key, ComponentLink6URL=https://datasheet.ciiva.com/1932/bq29200-09-1932171.pdf?src-supplier=Digi-Key, ComponentLink7Description=https://datasheet.ciiva.com/1932/bq29200-09-1932172.pdf?src-supplier=Digi-Key, ComponentLink7URL=https://datasheet.ciiva.com/1932/bq29200-09-1932172.pdf?src-supplier=Digi-Key, Contact Plating=Gold, DatasheetVersion=SLUSA52A, Eco-Plan="Green (RoHS & no Sb/Br)", Lead Acid=N, Lead Free="Lead Free", Li-Ion=N, Li-Polymer=N, Manufacturer Part Number=BQ29209DRBR, Mounting Technology="Surface Mount", NiCd=N, NiMH=N, Number of Batteries=2, Number of Pins=8, PackageDescription="8-Pin Plastic Small Outline No-Lead, 3 x 3 x 1 mm Body, 0.65 mm Pitch, Exposed Pad", PackageReference=DRB0008B, PackageVersion="revK, Jun-2012", Packaging="Tape and Reel", PartNumber=BQ29209DRBR, Pricing 1="1 = 0.90000, 10 = 0.80200, 100 = 0.62540, 500 = 0.51664, 1000 = 0.40788 (USD)", Radiation Hardening=No, REACH SVHC="No SVHC", RoHS=Yes, Stock 1=15242, SubFamily="Lithium Ion Protection", Supplier 1=Digi-Key
U4: Case/Package=SOIC, Manufacturer=Maxim, Manufacturer Part Number=DS2438Z+T&R, Max Operating Temperature=85°C, Max Supply Voltage=10V, Min Operating Temperature=-40°C, Min Supply Voltage=2.4V, Package Quantity=2500, Supplier Part Number 1=DS2438Z+T&RCT-ND, ComponentLink1Description=https://datasheet.ciiva.com/12230/ds2438-21641-12230641.pdf?src-supplier=Mouser, ComponentLink1URL=https://datasheet.ciiva.com/12230/ds2438-21641-12230641.pdf?src-supplier=Mouser, ComponentLink2Description=https://datasheet.ciiva.com/3214/ds2438-3214698.pdf?src-supplier=Avnet, ComponentLink2URL=https://datasheet.ciiva.com/3214/ds2438-3214698.pdf?src-supplier=Avnet, ComponentLink3Description=https://datasheet.ciiva.com/14089/ds2438-14089309.pdf?src-supplier=Digi-Key, ComponentLink3URL=https://datasheet.ciiva.com/14089/ds2438-14089309.pdf?src-supplier=Digi-Key, ComponentLink4Description=https://datasheet.ciiva.com/17299/ds2438-17299519.pdf?src-supplier=Avnet+Europe, ComponentLink4URL=https://datasheet.ciiva.com/17299/ds2438-17299519.pdf?src-supplier=Avnet+Europe, Contact Plating=Tin, Interface=Serial, Lead Free="Lead Free", Mount="Surface Mount", Number of Batteries=2, Number of Pins=8, Packaging="Tape and Reel", Pricing 1="1=5.81000, 10=5.22100, 25=4.93640, 100=4.27810, 250=4.05872, 500=3.64188, 1000=3.07146 (USD)", Radiation Hardening=No, REACH SVHC="No SVHC", RoHS=Yes, Stock 1=6617, Supplier 1=Digi-Key